# EAGLE board LB_BIT_oX_1IN_1OUT-MEDIUM-v03(1_1x) (EAGLE 6.5.0)
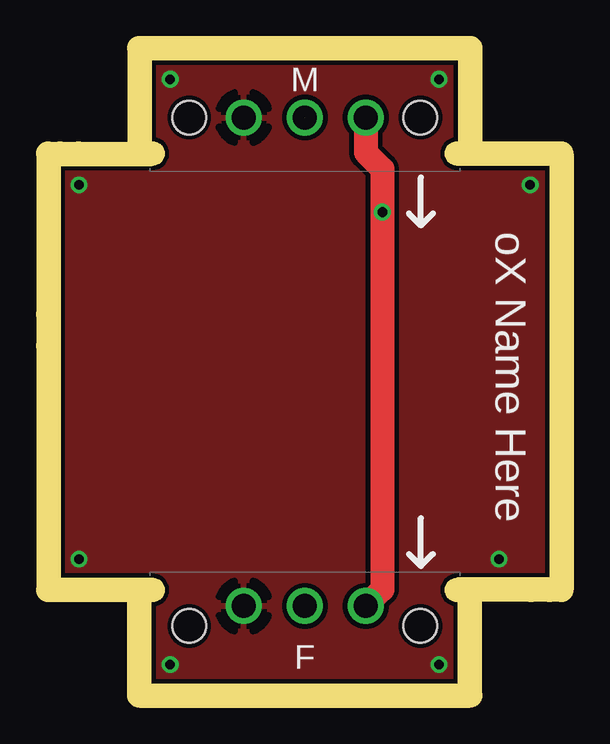
[diagram p0: board, top side]
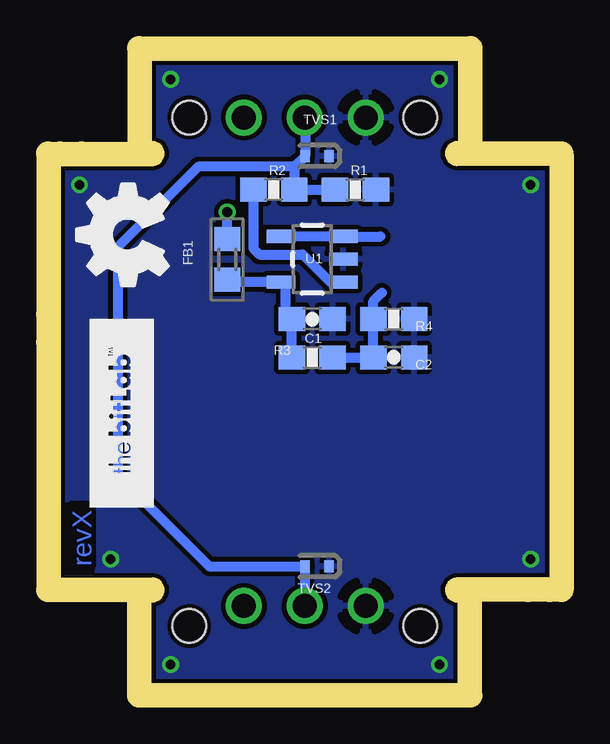
[diagram p1: board, bottom side, seen from below]

Size 20.4 x 26 mm. Coordinates in mm from the lower left corner, seen from the top.
Outline: 0,21.6 0,4.4
Outline: 20.4,21.6 20.4,4.4
Copper layers (1*16): Top 0.035mm / dielectric 1.5mm / Bottom 0.035mm
Design rules "default": minimum track width 0.2mm, minimum drill 0.4mm, track to track 0.2mm, track to pad 0.2mm, pad to pad 0.2mm, via to via 0.2mm, smd to smd 0mil, copper to edge 0.2mm, drill to drill 0.2mm, minimum pad ring 0.2mm, minimum via ring 0.15mm, stop-mask expansion 0.1mm, vias tented up to drill 0mil, thermal gap 0.2mm
Milling: 8 lines

## Footprints (pad centres in the part's own frame; a part is rotated, then mirrored left to right if it is on the bottom)
BITSNAP_V03_FEMALE = drill 1: GND 4.065,3.44; SIG 6.605,3.44; VCC 9.145,3.44 | hole 1.4: 1.785,2.61; 11.425,2.61
BITSNAP_V03_MALE = drill 1: GND1 9.145,2.61; SIG1 6.605,2.61; VCC1 4.065,2.61 | hole 1.4: 1.785,2.61; 11.425,2.61
CAP-0603 = smd 1.1 x 1: 1 -0.85,0; 2 0.85,0
R0603 = smd 1 x 1.1: 1 -0.85,0; 2 0.85,0
RES-0603 = smd 1.1 x 1: 1 -0.85,0; 2 0.85,0
SOD-923 = smd 0.4 x 0.5: 1 -0.5,0; 2 0.5,0
SOT23-5 = smd 0.55 x 1.2: 1 -0.95,-1.3; 2 0,-1.3; 3 0.95,-1.3; 4 0.95,1.3; 5 -0.95,1.3

## Placement (x,y rotation side)
BSF1  BITSNAP_V03_FEMALE  [BITSNAP_V03_FEMALE]  3.6,-0.21 0 top
BSM1  BITSNAP_V03_MALE  [BITSNAP_V03_MALE]  16.8,26.21 180 top
C1  0.1uF  [CAP-0603]  9.89,15.19 0 bottom
C2  10uF  [CAP-0603]  6.49,13.59 0 bottom
FB1  FERRITE-BEAD0603  [R0603]  13.43,17.68 90 bottom
R1  1meg  [RES-0603]  8.09,20.59 180 bottom
R2  10K  [RES-0603]  11.49,20.59 0 bottom
R3  3K3  [RES-0603]  9.89,13.59 180 bottom
R4  3K3  [RES-0603]  6.49,15.19 180 bottom
TVS1  ESD9B5.0ST5G  [SOD-923]  9.69,21.99 180 bottom
TVS2  ESD9B5.0ST5G  [SOD-923]  9.69,4.89 180 bottom
U1  LV321SOT23-5  [SOT23-5]  9.89,17.7 90 bottom
U$1  OSHW-LOGOL  [OSHW-LOGO-L]  -40.52,-68.43 0 top  (outside the outline)
U$2  OSHWCREDIT  [OSHWCREDIT]  -95.25,-64.52 0 top  (outside the outline)
U$3  FRAME-LETTER  [FABDWG01-OHW]  -3.01,-0.21 0 top  (outside the outline)
U$4  [OSHW_FILLX150_NOTEXT]  15.89,16.59 90 bottom
U$5  [BITLAB-LOGO]  16.49,15.19 270 top

## Library data of the parts
BSF1 BSM1 = bitSnap
C1 C2 FB1 R1-R4 U1 U$2 U$3 U$5 = LITTLEBITS
TVS1 TVS2 = LITTLEBITS; IEC_ESD_PROT0: +/-18kV; LB_PN: ?; MPN: ESD9B5.0ST5G; V_CLAMP: ?; V_OPERATION: 5V
U$1 = LITTLEBITS131206
U$4 = ohw-logo

## Nets
GND: BSF1.GND BSM1.GND1 C1.2 C2.2 R1.1 R4.1 TVS1.1 TVS2.1 U1.2
LB_VCC: BSF1.VCC BSM1.VCC1 FB1.2
N$2: U1.3 U1.4
N$4: R2.1 U1.1
SIG: BSF1.SIG BSM1.SIG1 R1.2 R2.2 TVS1.2 TVS2.2
VCC: C1.1 FB1.1 R3.2 U1.5
VREF: C2.1 R3.1 R4.2

## Tracks (layer width: path | path; a pad name or v marks a point on that pad's centre or on a via)
GND  (via drill 0.4)
  other vias: 4.59,0.79 15.79,0.79 18.29,5.19 19.59,20.79 15.79,25.2 4.59,25.2 0.79,20.79 0.79,5.19
  pour Bottom: 0.02,-0.12 20.41,-0.12 20.41,25.98 0.02,25.98
  pour Top: 0.02,-0.12 20.41,-0.12 20.41,25.98 0.02,25.98
LB_VCC  (via drill 0.4)
  Top 1: BSM1.VCC1 12.74,22.14 13.43,21.45 v13.43,19.65 13.43,3.92 BSF1.VCC
  Bottom 0.406: FB1.2 v13.43,19.65
N$2
  Bottom 0.406: U1.4 U1.3 7.04,18.64
N$4
  Bottom 0.406: R2.1 12.34,18.14 12.09,17.89 10.29,17.89 9.14,16.74 U1.1
SIG  (1 unrouted)
  Bottom 0.406: R1.2 R2.2 10.64,21.54 | BSM1.SIG1 TVS1.2 10.64,21.54 | 10.64,21.54 14.64,21.54 17.99,18.2 17.99,8.69 14.19,4.89 TVS2.2 BSF1.SIG
VCC
  Bottom 0.406: U1.5 13.33,16.74 FB1.1 | U1.5 11.14,16.7 | 10.74,15.14 C1.1 | U1.5 10.99,16.74 10.99,15.29 C1.1 | R3.2 C1.1
VREF
  Bottom 0.406: R3.1 C2.1 R4.2 7.34,15.95 6.99,16.29

## Text on the board
Bottom: revX
tPlace: oX Name Here